# Altium PCB CC_v00.PcbDoc
Units mm, origin at the board's own origin, x right, y up, seen from the top; angles counter-clockwise.
Board outline 37.25 x 18.25 mm, 2 copper layers (Top Layer, Bottom Layer), stack 1.571 mm thick; 27 components, 19 nets, 71 pads, 15 vias.
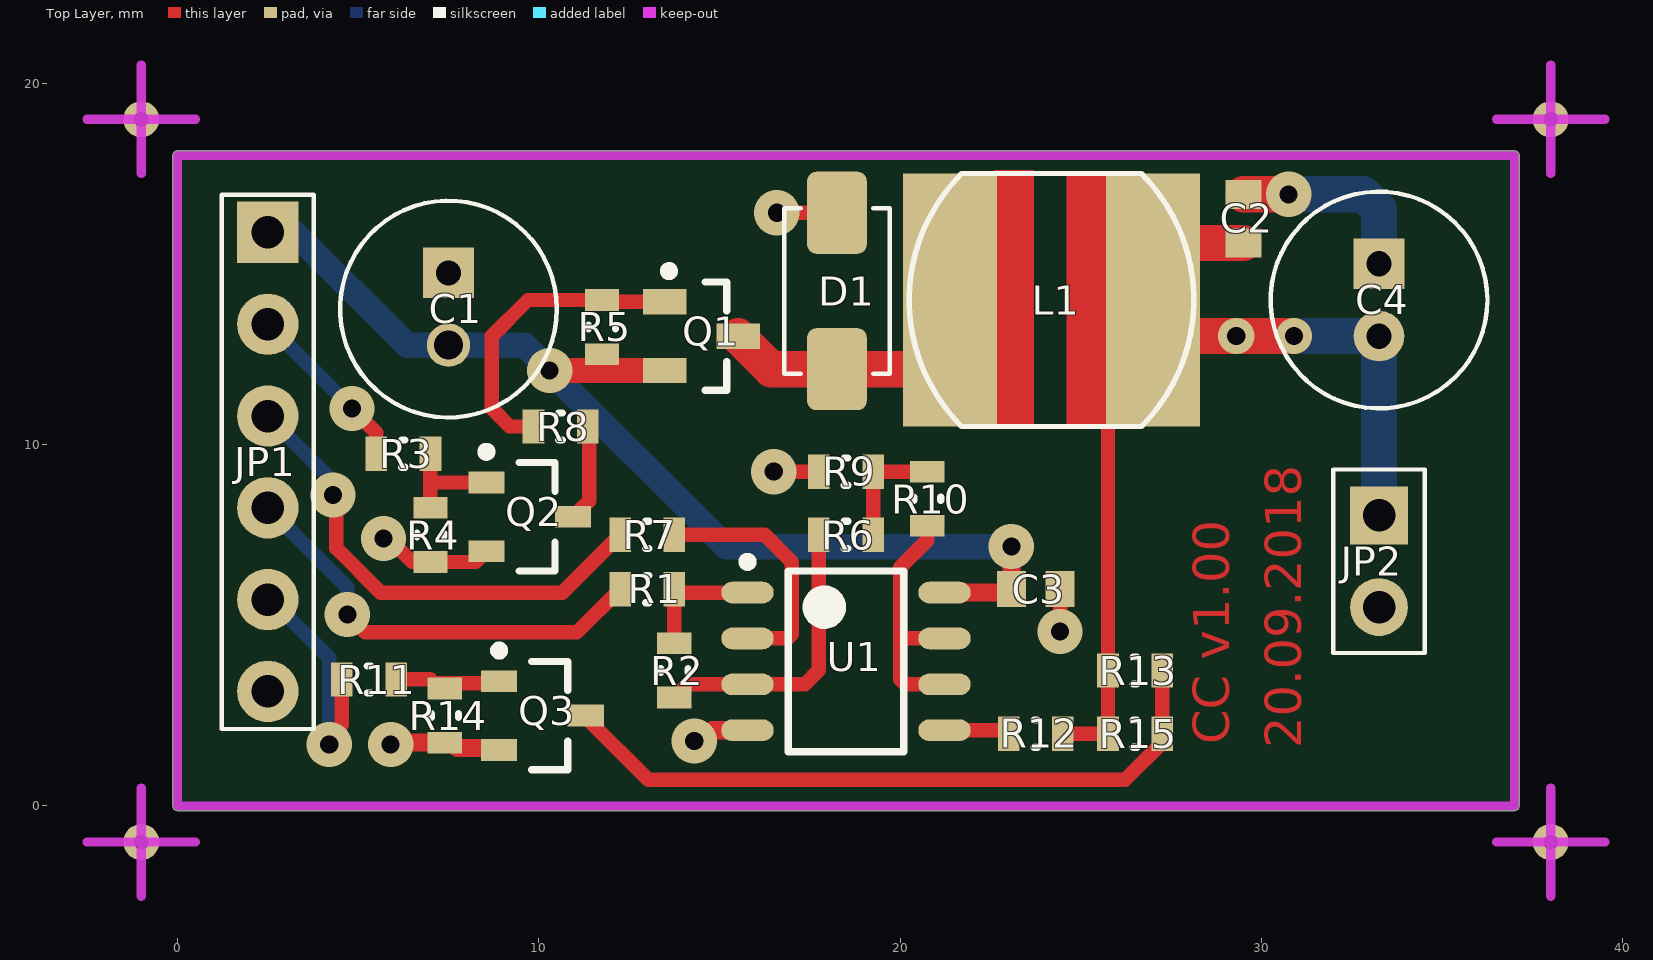
[diagram p0: Top Layer view]
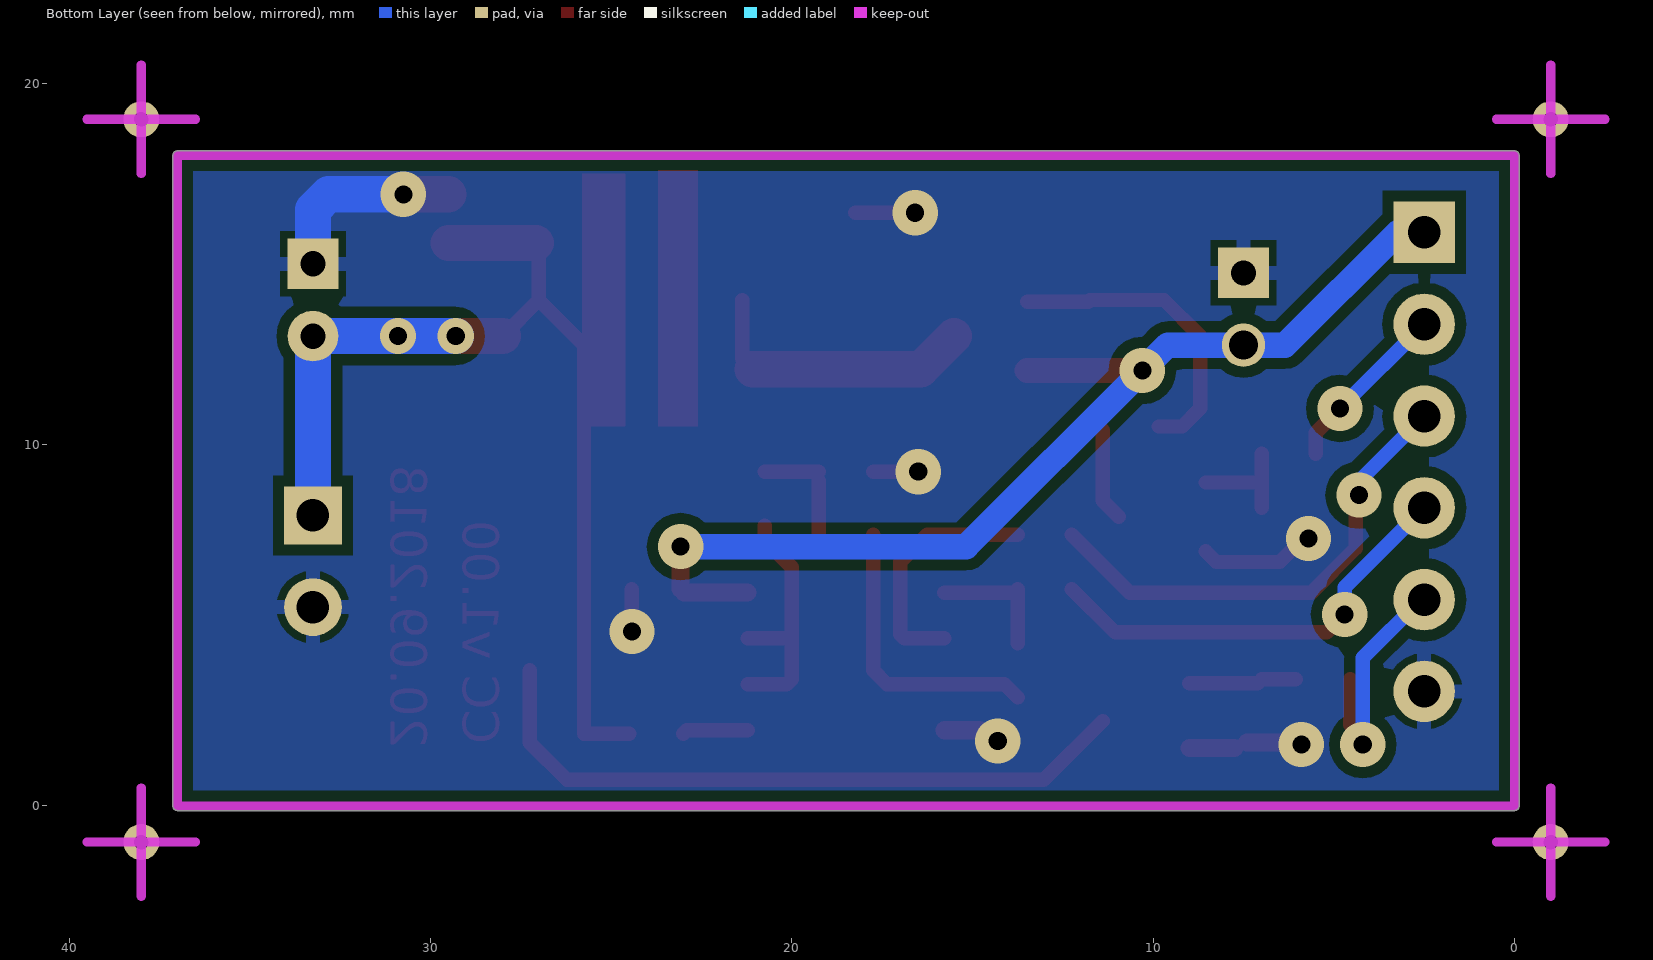
[diagram p1: Bottom Layer view, seen from below]

## Layer stack, top to bottom
Top Solder: solder mask 0.0102, Solder Resist, Dk 3.5
Top Layer: signal copper 0.0356
Dielectric 1: dielectric 1.5, FR-4, Dk 4.8
Bottom Layer: signal copper 0.0356
Bottom Solder: solder mask 0.0102, Solder Resist, Dk 3.5

## Board outline
-0.127,0 ccw(c0,0) 0,-0.127 37,-0.127 ccw(c37,0) 37.127,0 37.127,18 ccw(c37,18) 37,18.127 0,18.127 ccw(c0,18) -0.127,18

## Design rules (kind name [scope] priority, off if disabled: settings)
Clearance Clearance_1 [InNamedPolygon('GND_B')] p1: gap=0.3 ignorepadtopadclearanceinfootprint=FALSE
Clearance [All] p2: gap=0.254 ignorepadtopadclearanceinfootprint=FALSE except(0: Arc-Hole Track-Hole SMDPad-Hole THPad-Hole Via-Hole Fill-Hole Poly-Hole Region-Hole Text-Hole)
PolygonConnect PolygonConnect_1 [IsVia vs IsNamedPolygon('GND_B')] p1: connectstyle=Direct reliefconductorwidth=0.254 reliefentries=4 polygonreliefangle="90 Angle" airgapwidth=0.254
PolygonConnect PolygonConnect_3 [All vs IsNamedPolygon('GND_B')] p2: thpad.connectstyle=Relief thpad.reliefconductorwidth=0.4 thpad.reliefentries=4 thpad.polygonreliefangle="90 Angle" thpad.airgapwidth=0.2 smdpad.connectstyle=Relief smdpad.reliefconductorwidth=0.3 smdpad.reliefentries=4 smdpad.polygonreliefangle="90 Angle" smdpad.airgapwidth=0.2 via.connectstyle=Relief via.reliefconductorwidth=0.254 via.reliefentries=4 via.polygonreliefangle="90 Angle" via.airgapwidth=0.254
RoutingVias [All] p1: holewidth=0.711 width=1.27 viastyle="Through Hole" minholewidth=0.711 minwidth=1.27 maxholewidth=0.711 maxwidth=1.27
SolderMaskExpansion [All] p1: expansion=0.102
Width [All] p1: maxlimit=2 minlimit=0.254 preferedwidth=0.254
30 further rules are at their usual default settings.

## Components (designator, comment, footprint, x,y, rotation, side; value= is the part's Value field where it differs from the comment)
C1 "100u 16V" CAPPRD200W50D600H1250#1 7.5,13.75 r270 top
C2 "100n" CAPC1608X08N 29.5,16.25 r90 top
C3 "100n" CAPC1608X08N 23.75,6 r180 top
C4 "100u 16V" CAPPRD200W50D600H1250#2 33.25,14 r270 top
D1 "SS14" DIOM521X260X241L114X145N 18.25,14.25 r90 top
JP1 "Header 6" HDRV6W70P254_6X1_1397X254H754 2.5,15.87 r270 top
JP2 "Header 2" HDRV2W64P254_2X1_508X254H854 33.25,8.04 r270 top
L1 "L*" SND-0705 21.375,14 r0 top
Q1 "IRLML6402" SOT-23 14.5,13 r0 top
Q2 "BC847C" SOT95P245X110-3N 9.75,8 r0 top
Q3 "IRLML2502" SOT95P245X110-3N 10.1,2.5 r0 top
R1 "1k" RESC1608X06N 13,6 r180 top
R2 "1M" RESC1608X06N 13.75,3.75 r90 top
R3 "10k" RESC1608X06N 6.25,9.75 r180 top
R4 "10k" RESC1608X06N 7,7.5 r270 top
R5 "2k" RESC1608X06N 11.75,13.25 r270 top
R6 "22k" RESC1608X06N 18.5,7.5 r180 top
R7 "22k" RESC1608X06N 13,7.5 r0 top
R8 "1k" RESC1608X06N 10.6,10.5 r180 top
R9 "nc" RESC1608X06N 18.5,9.25 r180 top
R10 "0" RESC1608X06N 20.75,8.5 r90 top
R11 "1k" RESC1608X06N 5.3,3.5 r180 top
R12 "1M" RESC1608X06N 23.75,2 r0 top
R13 "10k" RESC1608X06N 26.5,3.75 r180 top
R14 "1k" RESC1608X06N 7.4,2.5 r90 top
R15 "nc" RESC1608X06N 26.5,2 r180 top
U1 "LM2904" SOIC127P600X175-8N 18.5,4 r0 top

## Footprints (in the part's own frame and the unit in brackets; to place one, negate y for a bottom-side part, rotate by r counter-clockwise, add the part's x,y. Pads: shape width x height; smd on the part's side, far side on the other; paste and mask are expansions set on the pad)
CAPC1608X08N [mm] "Chip Capacitor, 2-Leads, Body 1,60x0,80mm, IPC Medium Density"
  rect 0.8x1 smd: 1(-0.675,0) 2(0.675,0)
  body extent -0.87,-0.48 0.87,0.47, height 0.85
CAPPRD200W50D600H1250#1 [mm] "Capacitor, Polarized, Radial (Electrolytic); 2.00 mm C X 6.00 mm Dia X 12.50 mm H body"
  rect 1.4x1.4 hole 0.7 paste-1.2: 1(-1,0)
  round 1.2 hole 0.8 paste-1.2: 2(1,0)
  silkscreen extent -3,-3 3,3, body extent -3,-3 3.01,3, height 12.51
CAPPRD200W50D600H1250#2 [mm] "Capacitor, Polarized, Radial (Electrolytic); 2.00 mm C X 6.00 mm Dia X 12.50 mm H body"
  rect 1.4x1.4 hole 0.7 paste-1.2: 1(-1,0)
  round 1.4 hole 0.7 paste-1.2: 2(1,0)
  silkscreen extent -3,-3 3,3, body extent -3,-3 3.01,3, height 12.51
DIOM521X260X241L114X145N [mm] "Diode, Molded Body; 4.315 mm L X 2.605 mm W X 2.41 mm H body"
  rrect30% 2.27x1.65 smd: A(2.165,0) K(-2.165,0)
  silkscreen extent -2.29,-1.46 2.29,1.46, body extent -2.61,-1.3 2.61,1.3, height 2.41
HDRV2W64P254_2X1_508X254H854 [mm] "Header, Vertical, 2.54 mm pitch; 0.64 mm lead width, 2 pins, 1 row, 2 pins per row, 5.08 mm L X 2.54 mm W X 8.54 mm H body"
  rect 1.6x1.6 hole 0.9 paste-1.59: 1(0,0)
  round 1.6 hole 0.9 paste-1.59: 2(2.54,0)
  silkscreen extent -1.27,-1.27 3.81,1.27, body extent -1.27,-1.27 3.81,1.27, height 8.54
HDRV6W70P254_6X1_1397X254H754 [mm] "Header, Vertical, 2.54 mm pitch; 0.70 mm lead width, 6 pins, 1 row, 6 pins per row, 13.97 mm L X 2.54 mm W X 7.54 mm H body"
  rect 1.7x1.7 hole 0.9 paste-1.71: 1(0,0)
  round 1.7 hole 0.9 paste-1.71: 2(2.54,0) 3(5.08,0) 4(7.62,0) 5(10.16,0) 6(12.7,0)
  silkscreen extent -1.04,-1.27 13.74,1.27, body extent -0.64,-1.27 13.33,1.27, height 7.54
RESC1608X06N [mm] "Chip Resistor, 2-Leads, Body 1,60x0,82mm, IPC Medium Density"
  rect 0.6x0.95 smd: 1(-0.75,0) 2(0.75,0)
  silkscreen extent -0.05,-0.38 0.05,0.38, body extent -0.85,-0.48 0.85,0.48, height 0.6
SND-0705 [mm]
  rect 2.6x7 smd: 1(0,0) 2(5.625,0)
  silkscreen extent -1.12,-3.5 6.75,3.5
SOIC127P600X175-8N [mm] "SOIC, 8-Leads, Body 4,90x3,90mm, Pitch 1,27mm, IPC Medium Density"
  oval 1.45x0.6 smd: 1(-2.725,1.905) 2(-2.725,0.635) 3(-2.725,-0.635) 4(-2.725,-1.905) 5(2.725,-1.905) 6(2.725,-0.635) 7(2.725,0.635) 8(2.725,1.905)
  silkscreen extent -2.85,-2.5 1.6,2.88, body extent -3,-2.5 3,2.5, height 1.75
SOT95P245X110-3N [mm] "SOT23, 3-Leads, Body 2,90x2,45mm, Pitch 0,95mm, IPC Medium Density"
  rect 1x0.6 smd: 1(-1.2,0.95) 2(1.2,0) 3(-1.2,-0.95)
  silkscreen extent -1.32,-1.5 0.7,1.92, body extent -0.7,-1.5 0.7,1.5, height 1.1
SOT-23 [mm] "SOT23, 3-Leads, Body 2.9x1.3mm, Pitch 0.95mm, Lead Span 2.5mm, IPC High Density"
  rect 1.2x0.7 smd: 1(-1.016,0.95) 2(1.016,0) 3(-1.016,-0.95)
  silkscreen extent -1.02,-1.5 0.7,1.92, body extent -0.7,-1.5 0.7,1.5, height 1.1

## Part data
C1 C4: library part C-EL-DIP
C2 C3: library part CAPN
D1: library part "DIODE SCHOTTKY", Text Field1=30, Text Field2=20
JP1: "Header, 6-Pin", LatestRevisionDate=17-Jul-2002, LatestRevisionNote="Re-released for DXP Platform.", Publisher="Altium Limited"
JP2: "Header, 2-Pin", LatestRevisionDate=17-Jul-2002, LatestRevisionNote="Re-released for DXP Platform.", Publisher="Altium Limited"
Q1: library part MOSF-P
Q2: library part NPN
Q3: library part "MFET N"
R1 R2 R3 R4 R5 R6 R7 R8 R9 R10 R11 R12 R13 R14 R15: library part RES
U1: "2 Operation amplifier"

## Free pads (board coordinates)
  round 1 hole 0.4: 0(-1,-1) 0(-1,19) 0(38,-1) 0(38,19)

## Via types
v1: diameter 1.25, hole 0.5, Top Layer to Bottom Layer, 13 vias
v2: diameter 1, hole 0.5, Top Layer to Bottom Layer, 2 vias

## Nets (pads, with @x,y where several pads share a name; then routed paths per layer and width w, separated by ;. In a path a pad name is that pad's centre, name@x,y a point inside that pad or via, vN(x,y) a via of type N, cw(c..) or ccw(c..) an arc to the next point about the centre after c; other vN are vias at no path point)
+5V: C1.2 C3.2 JP1.1 Q1.3 R5.2 U1.8 | length 30.4
  Top Layer w0.4: C3.2@22.98,5.905 C3.2
  Top Layer w0.5: U1.8 C3.2@22.98,5.905 ; C3.2 v1(23.075,7.175)
  Top Layer w0.7: v1(10.3,12.05) Q1.3
  Bottom Layer w0.7: JP1.1 3.23,15.87 6.35,12.75 C1.2 9.6,12.75 v1(10.3,12.05) 15.175,7.175 v1(23.075,7.175)
GND: C1.1 C2.2 C3.1 C4.1 D1.A JP1.6 JP2.2 Q2.3 Q3.3 R4.2 R9.2 R14.1 U1.4 | length 17.2
  Top Layer w0.4: v1@5.75,7.5 6.5,6.75 R4.2 8.25,6.75 Q2.3 ; v1(16.5,9.25) R9.2 ; v1(16.585,16.415) D1.A ; v1(24.425,4.825) C3.1
  Top Layer w0.5: v1(5.9,1.7) 6.2,1.7 6.3,1.8 6.3,1.75 R14.1 ; R14.1@7.75,1.6 Q3.3@9,1.6 ; v1(14.3,1.8) 14.505,1.8 14.8,2.095 U1.4
  Top Layer w1: C2.2 v1(30.75,16.925)
  Bottom Layer w1: v1(30.75,16.925) 32.825,16.925 33.25,16.5 C4.1
  other v1: 5.7,7.4
NetC2_1: C2.1 C4.2 JP2.1 L1.2 R12.2 R13.2 R15.2 | length 31
  Top Layer w0.4: R12.2 R15.2 R13.2 25.75,12.75 L1.2 ; L1.2@27.075,15.575 27,15.5 L1.2 ; L1.2@28,13 L1.2
  Top Layer w1: L1.2@27.075,15.575 C2.1 ; L1.2@28,13 v2(30.9,13)
  Bottom Layer w1: v2(29.3,13) v2(30.9,13) C4.2 JP2.1
NetD1_K: D1.K L1.1 Q1.2 | length 8
  Top Layer w0.4: L1.1@21.085,12.085 21.375,12.375 L1.1
  Top Layer w1: Q1.2 16.431,12.085 D1.K L1.1@21.085,12.085
NetJP1_2: JP1.2 R3.2 | length 4.8
  Top Layer w0.4: v1(4.83,11) 5.5,10.33 R3.2
  Bottom Layer w0.4: JP1.2 v1(4.83,11)
NetJP1_3: JP1.3 R7.1 | length 13.4
  Top Layer w0.4: v1@4.4,8.6 4.4,7.126 5.626,5.9 10.65,5.9 R7.1
  Bottom Layer w0.4: JP1.3 4.3,8.99 v1(4.3,8.6)
NetJP1_4: JP1.4 R1.2 | length 12.1
  Top Layer w0.4: v1(4.7,5.3) 5.2,4.8 11.05,4.8 R1.2
  Bottom Layer w0.4: JP1.4 4.7,6.05 v1(4.7,5.3)
NetJP1_5: JP1.5 R11.2 | length 6.7
  Top Layer w0.4: v1(4.2,1.7) 4.2,1.9 4.55,2.25 R11.2
  Bottom Layer w0.254: JP1.5 JP1.5@2.59,5.71
  Bottom Layer w0.4: JP1.5@2.59,5.71 4.2,4.1 v1(4.2,1.7)
NetQ1_1: Q1.1 R5.1 R8.2 | length 8.6
  Top Layer w0.4: R8.2 9.2,10.5 8.7,11 8.7,13 9.7,14 R5.1 11.8,13.95 Q1.1
NetQ2_1: Q2.1 R3.1 R4.1 | length 3.1
  Top Layer w0.4: R4.1 7,9 ; R3.1 7,9 ; Q2.1 7.05,8.95 7,9
NetQ2_2: Q2.2 R8.1 | length 2.6
  Top Layer w0.4: Q2.2 11.4,8.45 R8.1@11.4,10.4
NetQ3_1: Q3.1 R11.1 R14.2 | length 3
  Top Layer w0.4: R11.1 7,3.5 7.1,3.4 Q3.1@9,3.4
NetQ3_2: Q3.2 R13.1 R15.1 | length 19
  Top Layer w0.4: Q3.2@11.4,2.35 13.029,0.721 26.221,0.721 27.25,1.75 R15.1 R13.1
NetR1_1: R1.1 R2.2 U1.1 | length 3.6
  Top Layer w0.4: R2.2 R1.1 13.845,5.905 U1.1
NetR2_1: R2.1 R6.2 U1.3 | length 8.1
  Top Layer w0.4: R2.1 14.115,3.365 U1.3 17.365,3.365 17.75,3.75 R6.2
NetR6_1: R6.1 R9.1 R10.2 | length 3
  Top Layer w0.4: R6.1 R9.1@19.25,9 ; R9.1 R10.2
NetR7_2: R7.2 U1.2 | length 6.8
  Top Layer w0.4: R7.2 16.25,7.5 17,6.75 17,4.75 16.885,4.635 U1.2
NetR10_1: R10.1 U1.6 U1.7 | length 7.1
  Top Layer w0.4: R10.1 20.75,7.35 20,6.6 20,4.635 ; U1.6 20.135,3.365 20,3.5 20,4.635 ; U1.7 20,4.635
NetR12_1: R12.1 U1.5 | length 1.8
  Top Layer w0.4: U1.5 22.905,2.095 R12.1

## Polygon pours and split planes (outlines as drawn)
GND on Bottom Layer "GND_B" (solid, remove dead copper, pour order 0): 0,0 37,0 37,18 0,18

## Keep-outs
Keep-Out Layer:
  lines w0.254: -2.5,-1 0.5,-1 ; -2.5,19 0.5,19 ; -1,-2.5 -1,0.5 ; -1,17.5 -1,20.5 ; 36.5,-1 39.5,-1 ; 36.5,19 39.5,19 ; 38,-2.5 38,0.5 ; 38,17.5 38,20.5 ; 0,0 0,18 37,18 37,0 0,0

## Other copper
Top Layer:
  rectangle net NetC2_1: 24.6,10.5 25.8,17.5
  rectangle net NetD1_K: 22.6,10.5 23.7,17.6
  text "CC v1.00" at 29.1,1.7 h1 r90
  text "20.09.2018" at 31.1,1.6 h1 r90